# Altium PCB Micro_Clock.PcbDoc
Units mil, origin at the board's own origin, x right, y up, seen from the top; angles counter-clockwise.
Board outline 6000 x 4000 mil, 2 copper layers (Top Layer, Bottom Layer); 27 components, 20 nets, 141 pads, 11 vias.
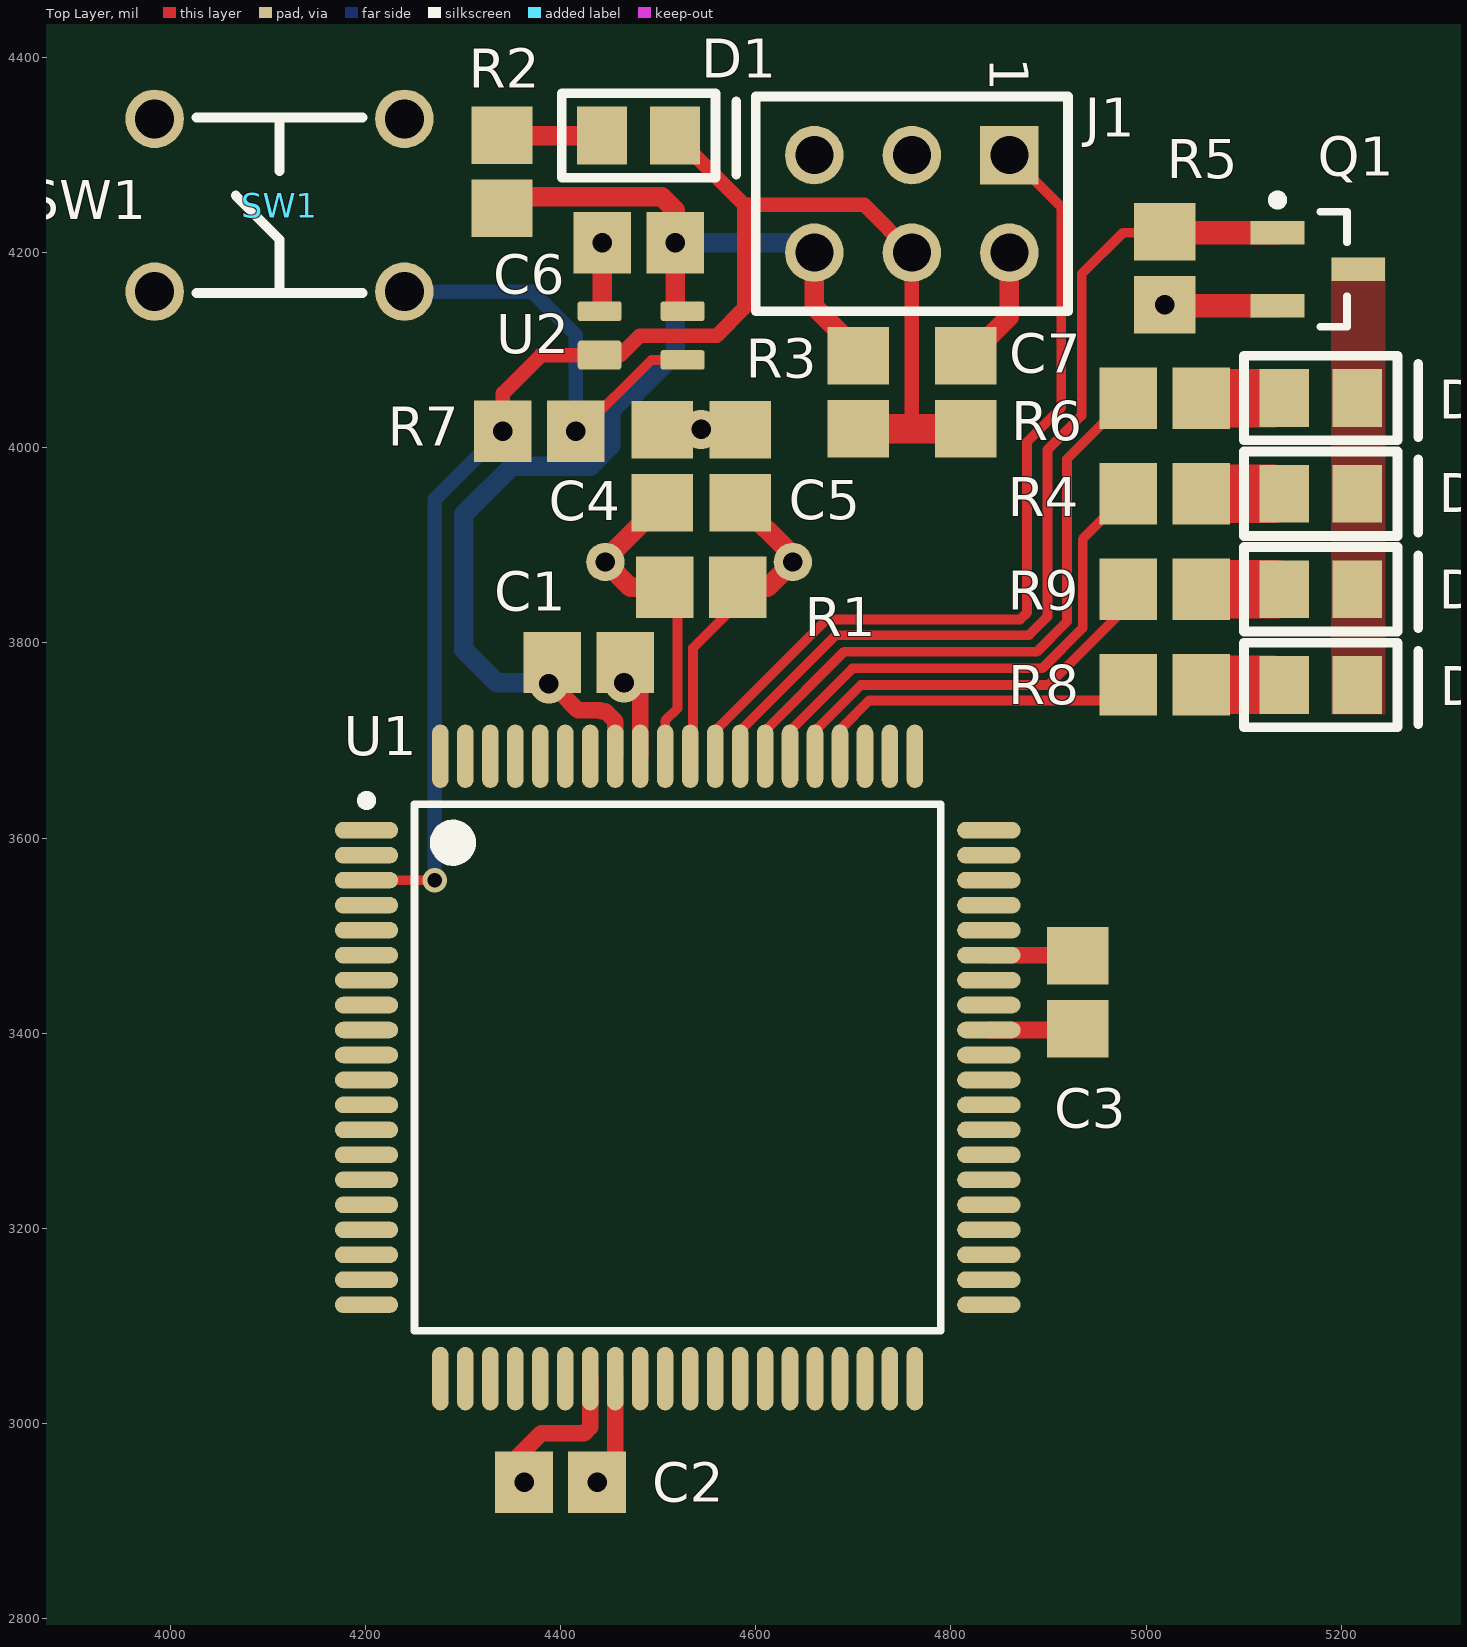
[diagram p0: Top Layer view]
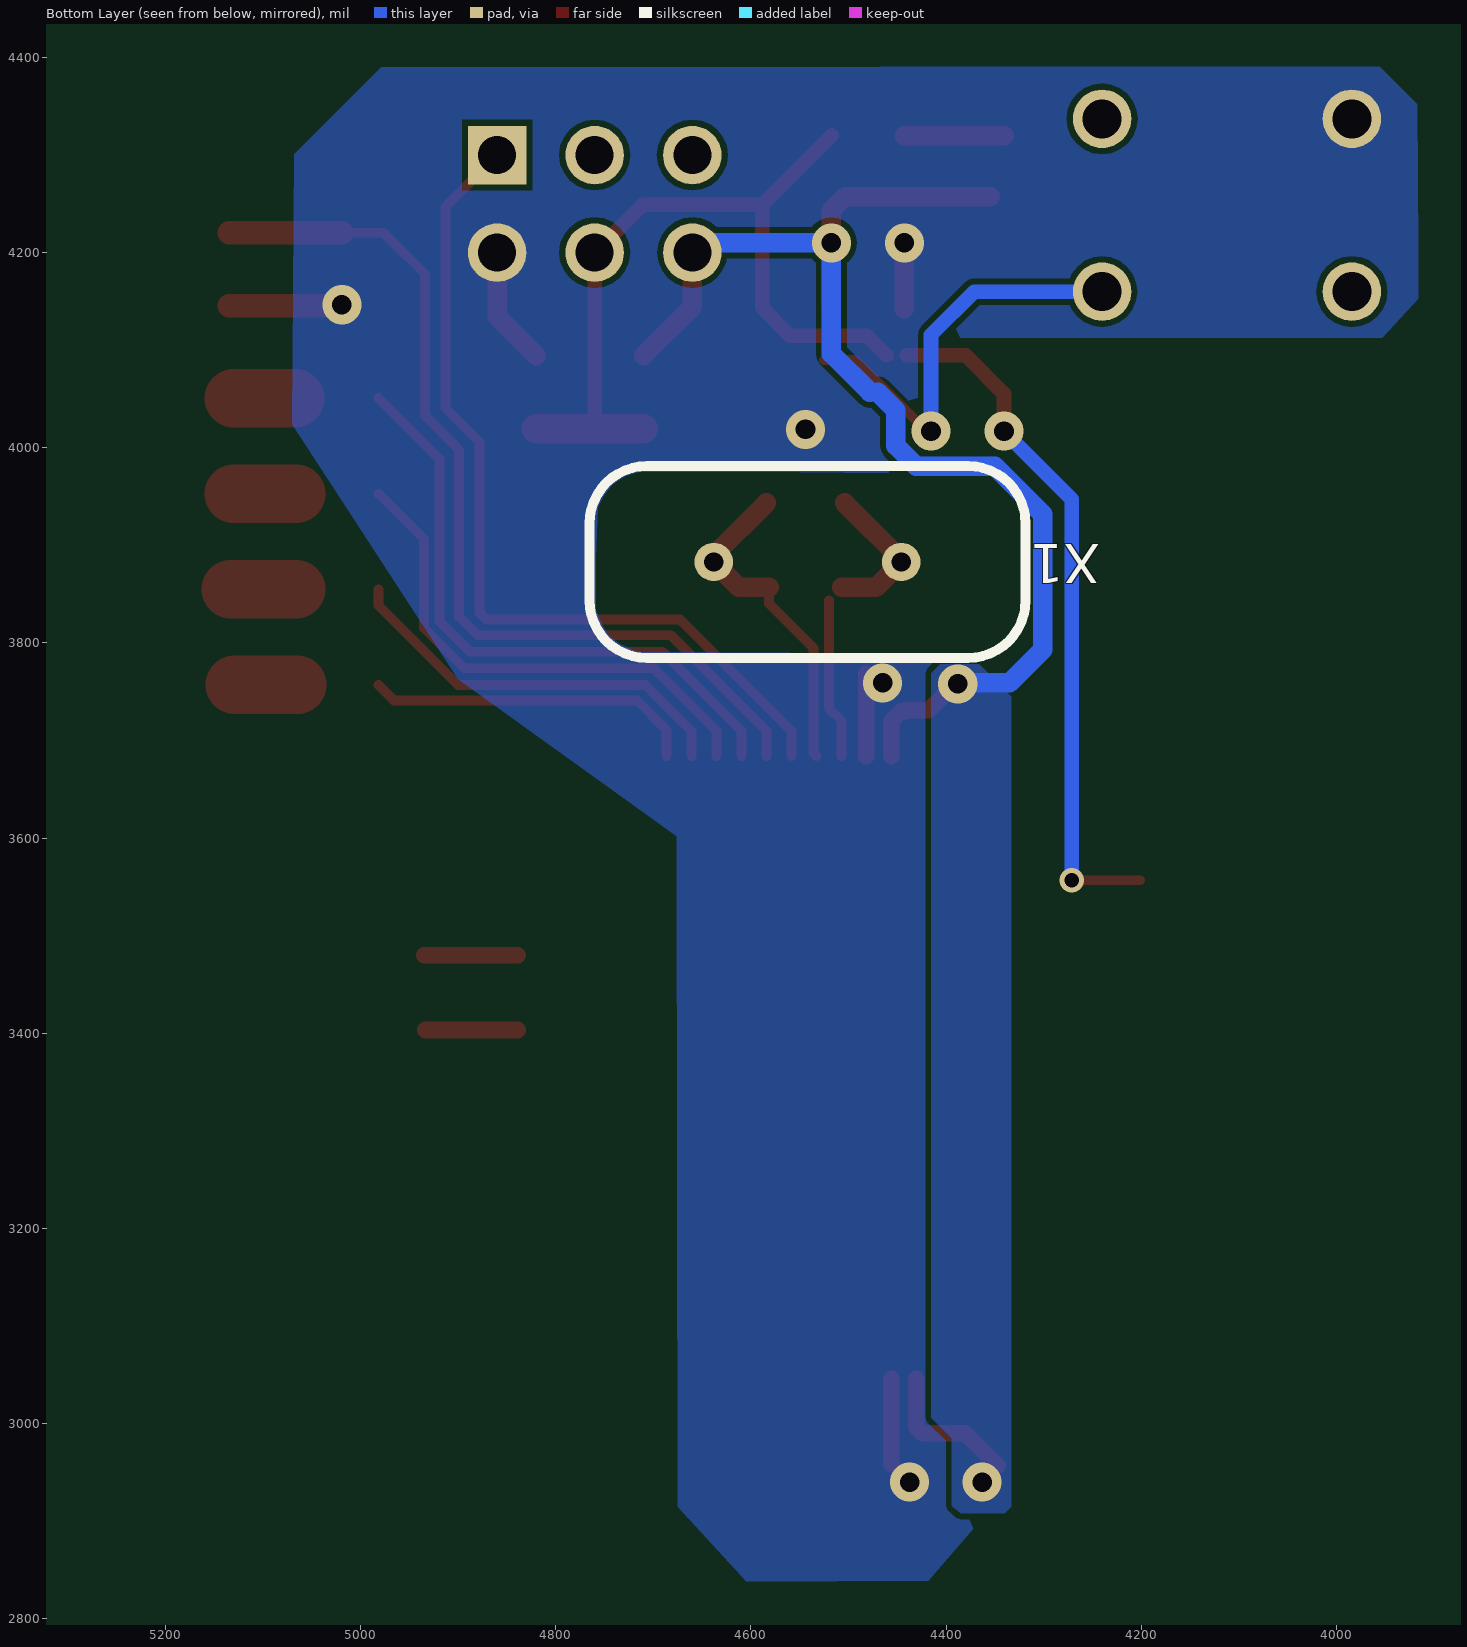
[diagram p1: Bottom Layer view, seen from below]

## Layer stack, top to bottom
Top Layer: signal copper 1.4
Dielectric: dielectric 12.6, FR-4, Dk 4.8
Bottom Layer: signal copper 1.4

## Board outline
1000,1000 7000,1000 7000,5000 1000,5000

## Design rules (kind name [scope] priority, off if disabled: settings)
Clearance [All] p1: gap=6
HoleSize [All] p1: absolutevalues=TRUE maxlimit=200 minlimit=15 maxpercent=80.000 minpercent=20.000
MinimumSolderMaskSliver [All] p1: minsoldermaskwidth=0
PlaneConnect [All] p1: planeconnectstyle=Direct reliefexpansion=20 reliefentries=4 reliefconductorwidth=10 reliefairgap=10
PolygonConnect [All] p1: connectstyle=Direct reliefconductorwidth=10 reliefentries=4 polygonreliefangle="90 Angle"
RoutingVias [All] p1: holewidth=20 width=40 viastyle="Through Hole" minholewidth=15 minwidth=30 maxholewidth=50 maxwidth=100
SilkscreenOverComponentPads [All] p1: minsilkscreentomaskgap=10
SolderMaskExpansion [All] p1: expansion=4
Width [All] p1: maxlimit=100 minlimit=10 preferedwidth=10
24 further rules are at their usual default settings.

## Components (designator, comment, footprint, x,y, rotation, side; value= is the part's Value field where it differs from the comment)
C1 "CAP 0.1uF" 0805 4429,3780 r180 top
C2 "CAP 0.1uF" 0805 4400,2940 r0 top
C3 "CAP 0.1uF" 0805 4930,3442 r270 top
C4 "CAP 20PF" 0805 4504,3981 r90 top
C5 "CAP 20PF" 0805 4584,3981 r90 top
C6 "CAP 0.1uF" 0805 4480,4210 r0 top
C7 "CAP 0.1uF" 0805 4815,4057 r270 top
D1 "D_LED_0805_RED" 0805P 4480,4320 r180 top
D2 "D_LED_0805_YELLOW" 0805P 5179,3855 r180 top
D3 "D_LED_0805_RED" 0805P 5179,3953 r180 top
D4 "D_LED_0805_BLUE" 0805P 5179,4051 r180 top
D5 "D_LED_0805_GREEN" 0805P 5179,3757 r180 top
J1 "BDM HHEADER" BDM_HEADER 4860,4300 r270 top
Q1 "2SK3541T2L" SOT-23 5176,4183 r0 top
R1 "R_0805_750k_1%" 0805 4544,3857 r180 top
R2 "R_0805_620_1%" 0805 4340,4283 r270 top
R3 "R_0805_5k" 0805 4705,4057 r270 top
R4 "R_0805_620_1%" 0805 5019,3953 r0 top
R5 "R_0805_10k_1%" 0805 5019,4184 r90 top
R6 "R_0805_620_1%" 0805 5019,4051 r0 top
R7 "R_0805_0" 0805 4378,4017 r180 top
R8 "R_0805_620_1%" 0805 5019,3757 r0 top
R9 "R_0805_620_1%" 0805 5019,3855 r0 top
SW1 "SW_TACT_SWITCH_6x6" TACT_SWITCH_6x6 4240,4160 r90 top
U1 "C3 Microcontroller" QFN_80_65P 4520,3365 r0 top
U2 "U_MAX6713T" SC70 4440,4140 r0 top
X1 "HC49" HC-49 4638,3883 r180 bottom

## Footprints (in the part's own frame and the unit in brackets; to place one, negate y for a bottom-side part, rotate by r counter-clockwise, add the part's x,y. Pads: shape width x height; smd on the part's side, far side on the other; paste and mask are expansions set on the pad)
0805 [mm] "0805 Resistor/Capacitor"
  rect 1.5x1.6 smd: 1(-0.95,0) 2(0.95,0)
  body extent -1.1,-0.72 1.1,0.72, height 1.1
0805P [mm] "Chip Capacitor; Body 2.0 x 1.2 mm (LxW typ)"
  rect 1.3x1.5 smd: 1(-0.95,0) 2(0.95,0)
  silkscreen extent -2.54,-1.1 2,1.1, body extent -1.02,-0.64 1.02,0.64, height 1.27
BDM_HEADER [mil]
  rect 60x60 hole 39: 1(0,0)
  round 60 hole 39: 2(0,-100) 3(0,-200) 4(100,-200) 5(100,-100) 6(100,0)
  silkscreen extent -60,-260 160,60, body extent -55,-255 155,55, height 418
HC-49 [mm]
  round 1 hole 0.5: 1(0,0) 2(4.88,0)
  silkscreen extent -3.23,-2.5 8.12,2.5
QFN_80_65P [mil]
  oval 65x17 smd: 1(-318.9,243.11) 2(-318.9,217.52) 3(-318.9,191.93) 4(-318.9,166.34) 5(-318.9,140.75) 6(-318.9,115.16) 7(-318.9,89.57) 8(-318.9,63.98) 9(-318.9,38.39) 10(-318.9,12.8) 11(-318.9,-12.8) 12(-318.9,-38.39) 13(-318.9,-63.98) 14(-318.9,-89.57) 15(-318.9,-115.16) 16(-318.9,-140.75) 17(-318.9,-166.34) 18(-318.9,-191.93) 19(-318.9,-217.52) 20(-318.9,-243.11) 41(318.9,-243.11) 42(318.9,-217.52) 43(318.9,-191.93) 44(318.9,-166.34) 45(318.9,-140.75) 46(318.9,-115.16) 47(318.9,-89.57) 48(318.9,-63.98) 49(318.9,-38.39) 50(318.9,-12.8) 51(318.9,12.8) 52(318.9,38.39) 53(318.9,63.98) 54(318.9,89.57) 55(318.9,115.16) 56(318.9,140.75) 57(318.9,166.34) 58(318.9,191.93) 59(318.9,217.52) 60(318.9,243.11)
  oval 17x65 smd: 21(-243.11,-318.9) 22(-217.52,-318.9) 23(-191.93,-318.9) 24(-166.34,-318.9) 25(-140.75,-318.9) 26(-115.16,-318.9) 27(-89.57,-318.9) 28(-63.98,-318.9) 29(-38.39,-318.9) 30(-12.8,-318.9) 31(12.8,-318.9) 32(38.39,-318.9) 33(63.98,-318.9) 34(89.57,-318.9) 35(115.16,-318.9) 36(140.75,-318.9) 37(166.34,-318.9) 38(191.93,-318.9) 39(217.52,-318.9) 40(243.11,-318.9) 61(243.11,318.9) 62(217.52,318.9) 63(191.93,318.9) 64(166.34,318.9) 65(140.75,318.9) 66(115.16,318.9) 67(89.57,318.9) 68(63.98,318.9) 69(38.39,318.9) 70(12.8,318.9) 71(-12.8,318.9) 72(-38.39,318.9) 73(-63.98,318.9) 74(-89.57,318.9) 75(-115.16,318.9) 76(-140.75,318.9) 77(-166.34,318.9) 78(-191.93,318.9) 79(-217.52,318.9) 80(-243.11,318.9)
  silkscreen extent -324,-270 270,279, body extent -276,-276 276,276, height 96
SC70 [mil]
  rrect25% 45x20 smd: 1(0,0) 3(85,-50) 4(85,0)
  rrect25% 45x30 smd: 2(0,-45)
  body extent 18,-65 67,14, height 39
SOT-23 [mm] "SOT23, 3-Leads, Body 3.0x2.7mm (max), Pitch 0.95mm, IPC Medium Density"
  rect 1.4x0.6 smd: 1(-1.05,0.95) 2(-1.05,-0.95) 3(1.05,0)
  silkscreen extent -1.17,-1.5 0.76,1.92, body extent -0.76,-1.52 0.76,1.52, height 1.12
TACT_SWITCH_6x6 [mil]
  round 60 hole 40: 1(0,0) 2(177.17,255.91) 3(177.17,0) 4(0,255.91)
  silkscreen extent -1,43 179,213, body extent -30,10 207,246, height 169

## Part data
C1 C2 C3 C6 C7: library part C_0805_0.1uF_1, "CAP CERM 0.1uF"
C4 C5: library part C_0805_20PF_100V_5%, "CAP CERM 20PF 5% 100V NP0 0805"
D1 D3: "LED CHIPLED 645NM RED DIFF 0805"
D2: "LED 595NM AMBER DIFF SMD 0805"
D4: "LED 2X1.2MM 470NM BL WTR CLR SMD"
D5: "LED CHIPLED 570NM GREEN 0805 SMD"
J1: library part J_BDM_HEADER, "BDM HEADER"
Q1: library part Q_2SK3541T2L, "MOSFET N-CH 20V 0.9A SOT-23"
R1: "RES 750K OHM 1/8W 1% 0805 SMD"
R2 R4 R6 R8 R9: "RES 620 OHM 1/8W 1% 0805 SMD"
R3: library part R_0805_5K_1%, "RES 5K OHM 1/8W 1% 0805 SMD"
R5: library part R_0805_10K_1%, "RES 10K OHM 1/8W 1% 0805 SMD"
R7: "RES 0 OHM 0805 SMD"
SW1: "SWITCH TACT 6MM BLACK 160GF"
U1: library part U_MCF51JM128VLK, "IC MCU 128/16K FLASH/SRAM 80LQFP"
U2: "MAX6713T Reset controller"
X1: library part X_HC49, "CRYSTAL 8.00 MHZ 20PF 49US"

## Via types
v1: diameter 40, hole 20, Top Layer to Bottom Layer, 10 vias
v2: diameter 25, hole 15, Top Layer to Bottom Layer, tented top, 1 vias

## Nets (pads, with @x,y where several pads share a name; then routed paths per layer and width w, separated by ;. In a path a pad name is that pad's centre, name@x,y a point inside that pad or via, vN(x,y) a via of type N, cw(c..) or ccw(c..) an arc to the next point about the centre after c; other vN are vias at no path point)
+3.3A: C3.2 U1.52 | length 94.7
  Top Layer w17: U1.52 C3.2@4933.61,3403.39
+3.3D: C1.2 C2.1 C6.2 J1.4 R2.2 R3.1 U1.27 U1.73 U2.4 | length 1456
  Top Layer w17: C2.1@4347,2957 4380,2990 4424,2990 4430.43,2996.43 U1.27 ; C1.2@4398.6,3750.4 4418,3731 4440.87,3731 4441.87,3730 4446,3730 4456.02,3719.98 U1.73
  Top Layer w20: R2.2@4354.9,4257.5 4503.5,4257.5 4517.4,4243.6 v1(4517.4,4210) U2.4@4517.4,4147.6 ; J1.4 4660,4144.4 R3.1@4710,4094.4
  Bottom Layer w20: v1(4388,3758) 4388,3750 4379,3759 4335,3759 4301,3793 4301,3932 4350,3981 4430.31,3981 4451.4,4002.09 4451.4,4038.4 4470,4057 ; 4478,4057 4517.4,4096.4 v1(4517.4,4210) 4650,4210 J1.4
  other v1: 4363,2940
AGND: C3.1 U1.55 | length 95.9
  Top Layer w17: U1.55 C3.1@4934.84,3480.16
BKGD: J1.1 U1.69 | length 901.2
  Top Layer w10: U1.69 4558.39,3709.88 4672.5,3824 4871,3824 4878,3831 4878,4006 4913,4041 4913,4247 J1.1
DGND: C1.1 C2.2 C4.2 C5.2 C6.1 C7.1 J1.6 Q1.2 R5.1 SW1.2 U1.28 U1.72 U2.1 | length 476.6
  Top Layer w17: C2.2@4456.02,2958.62 U1.28 ; U1.72 C1.1@4481.61,3768.79
  Top Layer w20: U2.1@4442.6,4142.6 v1(4442.6,4210) ; C7.1@4820,4094.4 4860,4134.4 J1.6
  Top Layer w24: R5.1@5020,4145.6 Q1.2
  other v1: 4437.4,2940 4465,3759 4544,4019 5019,4146.6
LED_BLU: R6.1 U1.67 | length 636.8
  Top Layer w10: U1.67 4609.57,3709.88 4690.68,3791 4888,3791 4919,3822 4919,3988.4 R6.1
LED_EN: Q1.1 R5.2 U1.68 | length 973.2
  Top Layer w10: U1.68 4583.98,3709.88 4682.09,3808 4880,3808 4899,3827 4899,3998 4934,4033 4934,4178 4976.4,4220.4 R5.2@5019,4220.4
  Top Layer w24: R5.2@5019,4220.4 Q1.1
LED_GND: D2.1 D3.1 D4.1 D5.1 Q1.3
LED_GRN: R8.1 U1.64 | length 341.5
  Top Layer w10: U1.64 4686.34,3711.08 4716.25,3741 4965.6,3741 R8.1
LED_RED: R4.1 U1.66 | length 526.5
  Top Layer w10: U1.66 4635.16,3709.88 4699.27,3774 4893.63,3774 4935,3815.37 4935,3906.4 R4.1
LED_YEL: R9.1 U1.65 | length 416.6
  Top Layer w10: U1.65 4660.75,3709.88 4707.86,3757 4900,3757 4981.6,3838.6 R9.1
NetD1_2: D1.2 R2.1 | length 102.2
  Top Layer w20: R2.1@4340.4,4320 D1.2
NetD2_2: D2.2 R9.2 | length 67
  Top Layer w60: R9.2@5066,3855 D2.2@5133,3855
NetD3_2: D3.2 R4.2 | length 64
  Top Layer w60: R4.2@5066,3953 D3.2@5130,3953
NetD4_2: D4.2 R6.2 | length 63
  Top Layer w60: R6.2@5067,4051 D4.2@5130,4051
NetD5_2: D5.2 R8.2 | length 64
  Top Layer w60: R8.2@5065,3757 D5.2@5129,3757
OSC1: C4.1 R1.2 U1.71 X1.2 | length 321.3
  Top Layer w10: X1.2 X1.2@4445.87,3885.47 ; U1.71 4507.2,3720.39 4519.81,3733 R1.2@4519.81,3843.78
  Top Layer w20: X1.2 4471.87,3857 R1.2 ; X1.2@4445.87,3885.47 C4.1
OSC2: C5.1 R1.1 U1.70 X1.1 | length 343.6
  Top Layer w10: U1.70 4535.81,3686.92 4535.81,3794.81 4581.4,3840.4 R1.1 ; X1.1 X1.1@4638,3889.6
  Top Layer w20: R1.1 4612,3857 X1.1 ; C5.1 X1.1@4638,3889.6
R\E\S\E\T\: C7.2 D1.1 J1.5 R3.2 R7.2 U1.3 U2.2 | length 1545.9
  Top Layer w10: U1.3 v2(4271,3556.93)
  Top Layer w15: v1(4340.6,4017) 4340.6,4055.6 4380,4095 U2.2 ; U2.2@4461,4095 4481,4115 4560,4115 4588.4,4143.4 4588.4,4249 ; D1.1 4588.4,4249 ; 4760,4022.6 J1.5 4711,4249 4588.4,4249
  Top Layer w30: R3.2@4710,4019.6 C7.2@4820,4019.6
  Bottom Layer w15: v2(4271,3556.93) 4271,3947.4 v1(4340.6,4017)
RSW: R7.1 SW1.1 U2.3 | length 427.6
  Top Layer w10: R7.1@4420,4017 4493,4090 U2.3
  Bottom Layer w15: SW1.1 4371,4160 4415.4,4115.6 v1(4415.4,4017)
pads on no net: J1.2 J1.3 SW1.3 SW1.4 U1.1 U1.2 U1.4 U1.5 U1.6 U1.7 U1.8 U1.9 U1.10 U1.11 U1.12 U1.13 U1.14 U1.15 U1.16 U1.17 U1.18 U1.19 U1.20 U1.21 U1.22 U1.23 U1.24 U1.25 U1.26 U1.29 U1.30 U1.31 U1.32 U1.33 U1.34 U1.35 U1.36 U1.37 U1.38 U1.39 U1.40 U1.41 U1.42 U1.43 U1.44 U1.45 U1.46 U1.47 U1.48 U1.49 U1.50 U1.51 U1.53 U1.54 U1.56 U1.57 U1.58 U1.59 U1.60 U1.61 U1.62 U1.63 U1.74 U1.75 U1.76 U1.77 U1.78 U1.79 U1.80

## Polygon pours and split planes (outlines as drawn)
LED_GND on Top Layer "Top Layer-No Net" (solid, pour order 1000): 5190,4195 5245,4195 5245,3727 5190,3727 5190,4195
+3.3D on Bottom Layer "Top Layer-No Net" (solid, pour order 1001): 4385,2908 4340,2908 4333,2915 4333,3745 4366,3778 4406,3778 4415,3769 4415,3006 4394,2985 4394,2916 4393,2915
DGND on Bottom Layer "Top Layer-No Net" (solid, pour order 1002): 3956,4391 3917,4352 3916,4202 3916,4153 3953,4113 4407,4113 4415.4,4063 4350,3862 4350,2918 4418,2839 4604,2838 4675,2915 4676,3602 4900,3763 5070,4024 5068,4301 4979,4390

## Other copper
Bottom Layer:
  pour cut-out: 4714.49,3975.48 4550,3975 4387,3973 4357.95,3972.95 4341,3961 4328.76,3943.76 4324,3926 4324,3838 4325,3831 4327,3825 4329,3821 4339,3804 4352,3796 4367,3791 4383,3789 4714,3791 4717,3791 4735,3799 4746,3808 4754,3821 4759,3834 4759,3887 4757,3939 4751,3951 4742,3962 4729,3971

## Text inside footprints (layer, text, board x,y; h text height)
J1: Top Overlay "1" at 4840,4400 h40 r270